# Altium PCB Nano Screw Terminal Adapter.PcbDoc
Units mm, origin at the board's own origin, x right, y up, seen from the top; angles counter-clockwise.
Board outline 70 x 50.5 mm, 2 copper layers (TOP, BOTTOM), stack 1.67 mm thick; 4 components, 29 nets, 236 pads, 0 vias.
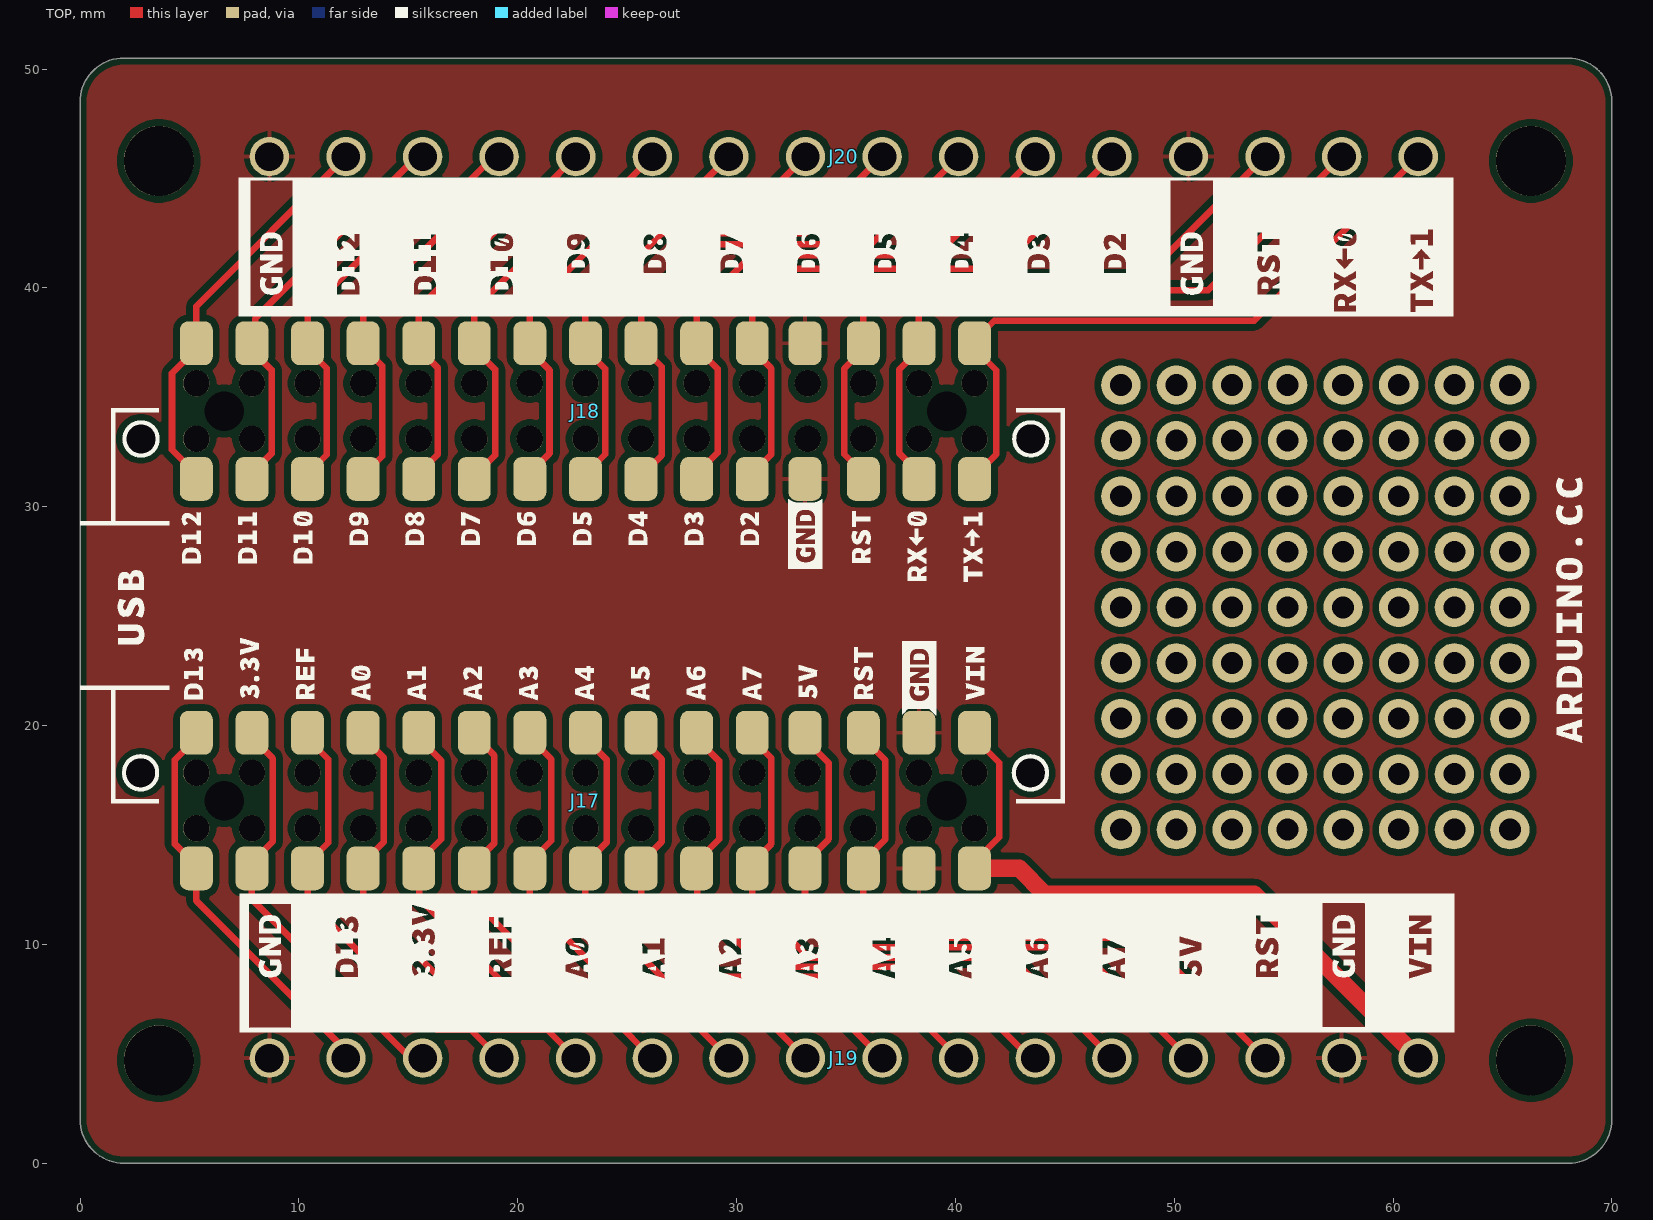
[diagram p0: TOP view]
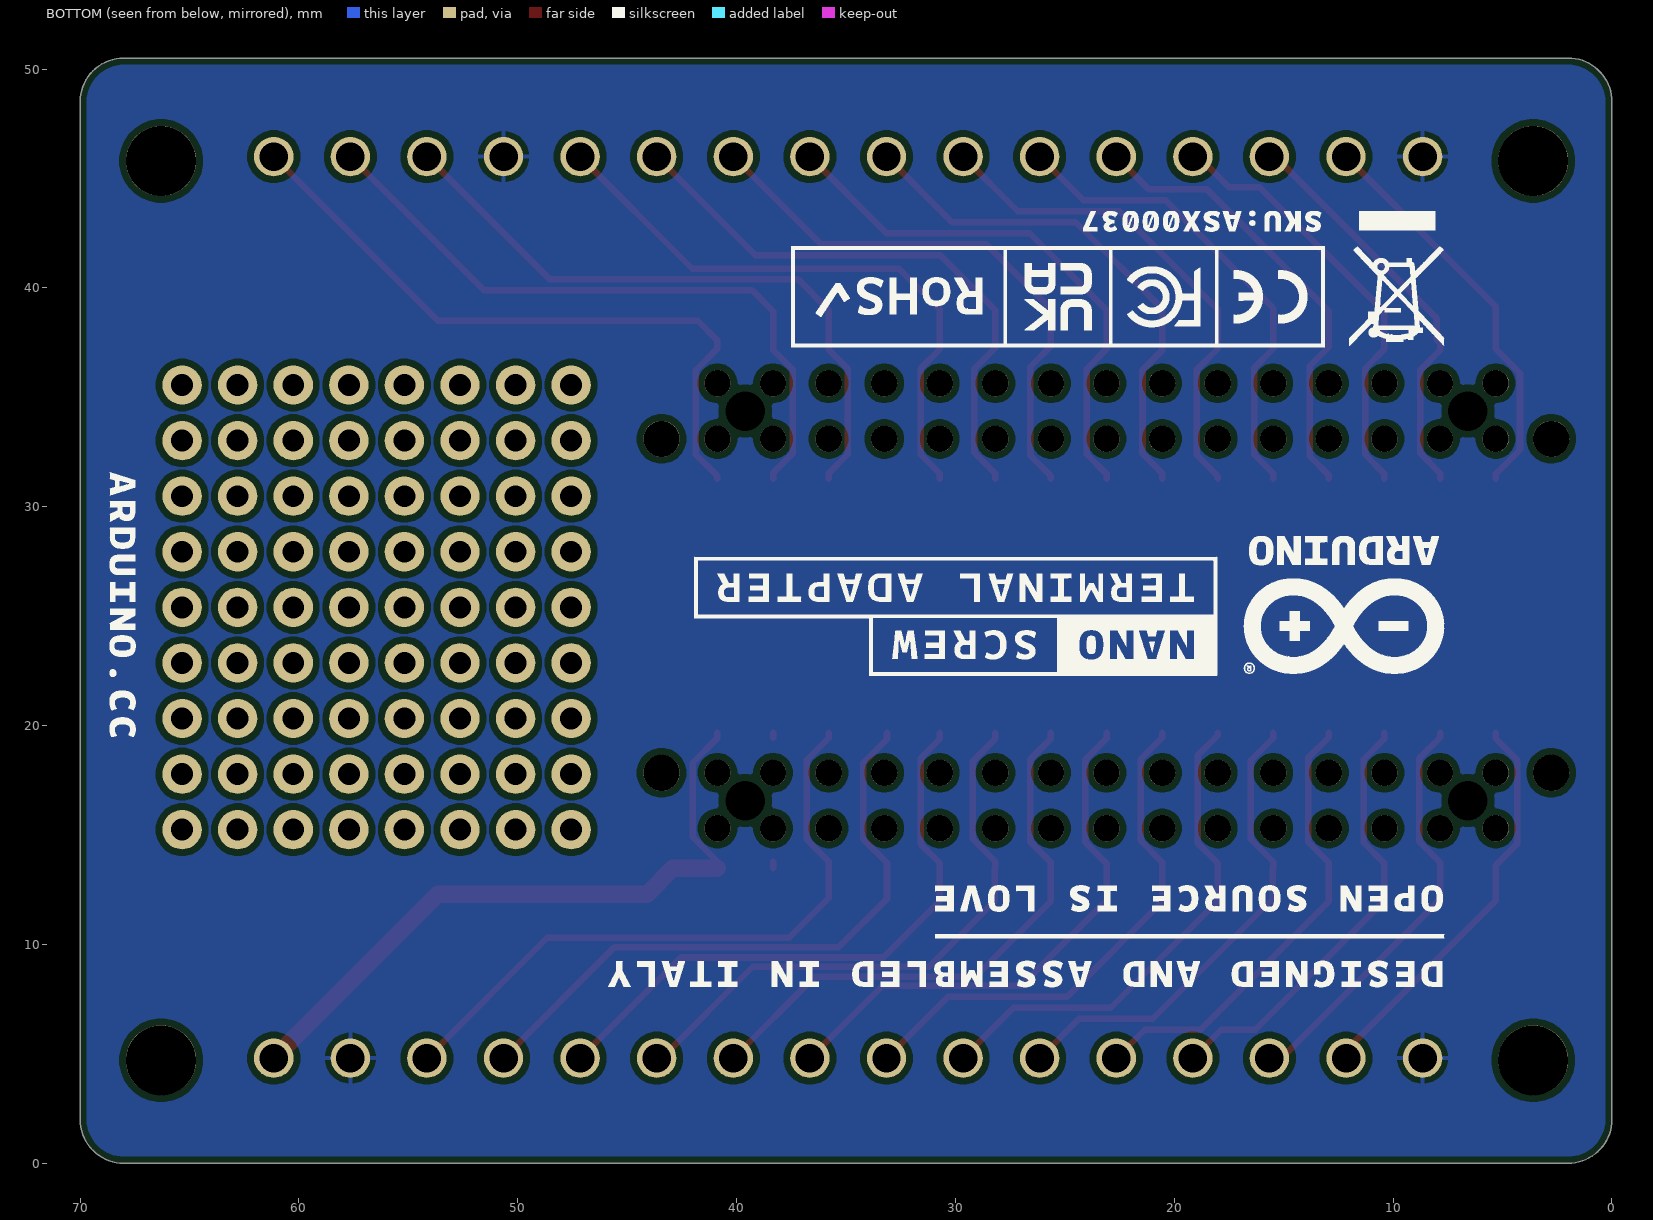
[diagram p1: BOTTOM view, seen from below]

## Layer stack, top to bottom
Top Solder: solder mask 0.0102, Solder Resist, Dk 3.5
TOP: signal copper 0.035
Dielectric2: core 1.6, FR-4, Dk 4.8
BOTTOM: signal copper 0.035
Bottom Solder: solder mask 0.0102, Solder Resist, Dk 3.5

## Board outline
0,2 0,48.5 cw(c2,48.5) 2,50.5 68,50.5 cw(c68,48.5) 70,48.5 70,2 cw(c68,2) 68,0 2,0 cw(c2,2)

## Design rules (kind name [scope] priority, off if disabled: settings)
BoardOutlineClearance Silks [(OnLayer('Top Overlay') OR OnLayer('Bottom Overlay'))] p1: gap=0.1 ignorepadtopadclearanceinfootprint=FALSE
BoardOutlineClearance [All] p2: gap=0.3 ignorepadtopadclearanceinfootprint=FALSE
Clearance COPPER_0.3mm [All] p1: gap=0.127 ignorepadtopadclearanceinfootprint=FALSE except(0.3: Arc-Fill Arc-Poly Arc-Region Track-Fill Track-Poly Track-Region SMDPad-Fill SMDPad-Poly SMDPad-Region THPad-Fill THPad-Poly THPad-Region Via-Fill Via-Poly Via-Region Fill-Fill Fill-Poly Fill-Region Poly-Poly Poly-Region Region-Region)
Clearance "Generic clearance 0.127mm" [All] p2: gap=0.15 ignorepadtopadclearanceinfootprint=FALSE
ComponentClearance [All] p1: gap=0.2 collisioncheckmode=3 verticalgap=0 showdistances=TRUE
DiffPairsRouting USB [InDifferentialPairClass('USB')] p1: maxlimit=0.15 minlimit=0.15 mostfreqgap=0.15 toplayer_minwidth=0.15 toplayer_maxwidth=0.21 toplayer_prefwidth=0.2 bottomlayer_minwidth=0.15 bottomlayer_maxwidth=0.21 bottomlayer_prefwidth=0.2 impedanceprofiledriven=TRUE impedanceprofileid={E6B00C31-4C8E-439C-824F-D2B2CDC26F9C} impedanceprofilevalue=90.000000 maxuncoupledlength=12.7
Height [All] p1: minheight=0 maxheight=30 prefheight=12.7
HoleSize [All] p1: absolutevalues=TRUE maxlimit=20 minlimit=0.3 maxpercent=80.000 minpercent=20.000
HoleToHoleClearance [All] p1: gap=0.14 allowstackedmicrovias=FALSE
MinimumAnnularRing [All] p1: minimumring=0.15
MinimumSolderMaskSliver [All] p1: minsoldermaskwidth=0.15
PlaneConnect [All] p1: pad.planeconnectstyle=Relief pad.reliefexpansion=0.508 pad.reliefentries=4 pad.reliefconductorwidth=0.254 pad.reliefairgap=0.254 via.planeconnectstyle=Direct via.reliefexpansion=0.508 via.reliefentries=4 via.reliefconductorwidth=0.254 via.reliefairgap=0.254
PolygonConnect [All] p1: thpad.connectstyle=Relief thpad.reliefconductorwidth=0.2 thpad.reliefentries=4 thpad.polygonreliefangle="90 Angle" thpad.airgapwidth=0.254 smdpad.connectstyle=Relief smdpad.reliefconductorwidth=0.2 smdpad.reliefentries=4 smdpad.polygonreliefangle="90 Angle" smdpad.airgapwidth=0.254 via.connectstyle=Direct via.reliefconductorwidth=0.254 via.reliefentries=4 via.polygonreliefangle="90 Angle" via.airgapwidth=0.254
RoomDefinition "Nano Screw Terminal Adapter" [InComponentClass('Nano Screw Terminal Adapter')] p1: confinementstyle=ConfineIn formatcopy=TRUE lockcomponents=FALSE outline 76.2,3.4 248.2,3.4 248.2,47.4 76.2,47.4
RoutingVias StandardVias [All] p1: holewidth=0.3 width=0.6 viastyle="Through Hole" minholewidth=0.2 minwidth=0.3 maxholewidth=20 maxwidth=20
SMDToCorner [All] p1: distance=39370
SilkToSilkClearance [All] p1: silktosilkclearance=0.15
SilkToSolderMaskClearance [IsPad] p1: minsilkscreentomaskgap=0.15 clearancetoexposedcopper=TRUE
SolderMaskExpansion VIAtented [IsVia] p1: expansion=0.102 istentingtop=TRUE
SolderMaskExpansion [All] p2: expansion=0.05 istentingtop=FALSE
UnRoutedNet [All] p1: checkbadconnections=TRUE
ViasUnderSMD [All] p1: allowed=FALSE
Width StandardTraces [All] p1: maxlimit=5 minlimit=0.127 preferedwidth=0.3
20 further rules are at their usual default settings.

## Components (designator, comment, footprint, x,y, rotation, side; value= is the part's Value field where it differs from the comment)
J17 "HLE-115-02-F-DV" HLE-115-02-F-DV-Footprint-1 23.094,16.57 r0 top
J18 "HLE-115-02-F-DV" HLE-115-02-F-DV-Footprint-1 23.094,34.37 r0 top
J19 "22TW-277" MK125002GO 34.9,4.8 r0 top
J20 "22TW-277" MK125002GO 34.9,46 r180 top

## Footprints (in the part's own frame and the unit in brackets; to place one, negate y for a bottom-side part, rotate by r counter-clockwise, add the part's x,y. Pads: shape width x height; smd on the part's side, far side on the other; paste and mask are expansions set on the pad)
HLE-115-02-F-DV-Footprint-1 [mm]
  round 1.2 hole 1.2 unplated mask+0.102: 0(-17.78,-1.27) 0(-17.78,1.27) 0(-15.24,-1.27) 0(-15.24,1.27) 0(-12.7,-1.27) 0(-12.7,1.27) 0(-10.16,-1.27) 0(-10.16,1.27) 0(-7.62,-1.27) 0(-7.62,1.27) 0(-5.08,-1.27) 0(-5.08,1.27) 0(-2.54,-1.27) 0(-2.54,1.27) 0(0,-1.27) 0(0,1.27) 0(2.54,-1.27) 0(2.54,1.27) 0(5.08,-1.27) 0(5.08,1.27) 0(7.62,-1.27) 0(7.62,1.27) 0(10.16,-1.27) 0(10.16,1.27) 0(12.7,-1.27) 0(12.7,1.27) 0(15.24,-1.27) 0(15.24,1.27) 0(17.78,-1.27) 0(17.78,1.27)
  round 0 hole 1.8 unplated paste-5: 0(-16.51,0) 0(16.51,0)
  rrect50% 1.5x2 smd mask+0.05: 1(-17.78,-3.1) 1(-17.78,3.1) 2(-15.24,-3.1) 2(-15.24,3.1) 3(-12.7,-3.1) 3(-12.7,3.1) 4(-10.16,-3.1) 4(-10.16,3.1) 5(-7.62,-3.1) 5(-7.62,3.1) 6(-5.08,-3.1) 6(-5.08,3.1) 7(-2.54,-3.1) 7(-2.54,3.1) 8(0,-3.1) 8(0,3.1) 9(2.54,-3.1) 9(2.54,3.1) 10(5.08,-3.1) 10(5.08,3.1) 11(7.62,-3.1) 11(7.62,3.1) 12(10.033,-3.1) 12(10.033,3.1) 13(12.7,-3.1) 13(12.7,3.1) 14(15.24,-3.1) 14(15.24,3.1) 15(17.78,-3.1) 15(17.78,3.1)
  body extent -19.05,-3.29 19.05,3.29, height 3.71
MK125002GO [mm]
  round 1.8 hole 1.3: 1(-26.25,0) 2(-22.75,0) 3(-19.25,0) 4(-15.75,0) 5(-12.25,0) 6(-8.75,0) 7(-5.25,0) 8(-1.75,0) 9(1.75,0) 10(5.25,0) 11(8.75,0) 12(12.25,0) 13(15.75,0) 14(19.25,0) 15(22.75,0) 16(26.25,0)
  body extent -28.48,-3.75 28.47,3.25, height 8.31

## Part data
J17 J18: library part J0233-A.13, "Board Connector, 30 Contact(s), 2 Row(s), Female, Straight, Surface Mount Terminal, Socket GPinto", Manufacturer=Samtec, Code Arduino=J0233, Connector Type="BOARD CONNECTOR", Contact Material=Copper, Mount=Board, Number of Contacts=30, Part Number=HLE-115-02-F-DV, REACH SVHC=Yes, Termination=SMD/SMT
J19 J20: library part J0275-A.6, "CONN MORS.CS 16v p3,5 10A aLING.VER BLACK", Manufacturer="4U CON", Max Current Rating=10A, Code Arduino=J0275, Number of Conductors=16, Number of Contacts=16, Part Number=22TW-277, Pin Count=16

## Free pads (board coordinates)
  round 1.8 hole 1 unplated: 0(47.56,15.24) 0(47.56,17.78) 0(47.56,20.32) 0(47.56,22.86) 0(47.56,25.4) 0(47.56,27.94) 0(47.56,30.48) 0(47.56,33.02) 0(47.56,35.56) 0(50.1,15.24) 0(50.1,17.78) 0(50.1,20.32) 0(50.1,22.86) 0(50.1,25.4) 0(50.1,27.94) 0(50.1,30.48) 0(50.1,33.02) 0(50.1,35.56) 0(52.64,15.24) 0(52.64,17.78) 0(52.64,20.32) 0(52.64,22.86) 0(52.64,25.4) 0(52.64,27.94) 0(52.64,30.48) 0(52.64,33.02) 0(52.64,35.56) 0(55.18,15.24) 0(55.18,17.78) 0(55.18,20.32) 0(55.18,22.86) 0(55.18,25.4) 0(55.18,27.94) 0(55.18,30.48) 0(55.18,33.02) 0(55.18,35.56) 0(57.72,15.24) 0(57.72,17.78) 0(57.72,20.32) 0(57.72,22.86) 0(57.72,25.4) 0(57.72,27.94) 0(57.72,30.48) 0(57.72,33.02) 0(57.72,35.56) 0(60.26,15.24) 0(60.26,17.78) 0(60.26,20.32) 0(60.26,22.86) 0(60.26,25.4) 0(60.26,27.94) 0(60.26,30.48) 0(60.26,33.02) 0(60.26,35.56) 0(62.8,15.24) 0(62.8,17.78) 0(62.8,20.32) 0(62.8,22.86) 0(62.8,25.4) 0(62.8,27.94) 0(62.8,30.48) 0(62.8,33.02) 0(62.8,35.56) 0(65.34,15.24) 0(65.34,17.78) 0(65.34,20.32) 0(65.34,22.86) 0(65.34,25.4) 0(65.34,27.94) 0(65.34,30.48) 0(65.34,33.02) 0(65.34,35.56)
  round 1.651 hole 1.651 unplated: MH(2.774,17.84) MH(2.774,33.1) MH(43.429,17.84) MH(43.429,33.1)
  round 3.2 hole 3.2 unplated: MH(3.6,4.7) MH(3.6,45.8) MH(66.3,4.7) MH(66.3,45.8)

## Nets (pads, with @x,y where several pads share a name; then routed paths per layer and width w, separated by ;. In a path a pad name is that pad's centre, name@x,y a point inside that pad or via, vN(x,y) a via of type N, cw(c..) or ccw(c..) an arc to the next point about the centre after c; other vN are vias at no path point)
+3V3: J17.2 J19.3 | length 19.2
  TOP w0.3: J17.2@7.854,19.67 7.854,19.446 8.811,18.489 8.811,14.711 7.854,13.754 7.854,13.47 7.854,12.046 14.813,5.087 15.363,5.087 J19.3
+5V: J17.12 J19.13 | length 29
  TOP w0.3: J17.12@33.127,19.67 33.127,19.373 34.22,18.28 34.22,14.82 33.127,13.727 33.127,12.073 35.327,9.873 45.577,9.873 J19.13
A0/D14: J17.4 J19.5 | length 21.3
  TOP w0.3: J17.4@12.934,13.47 12.934,13.734 13.885,14.685 13.885,18.515 12.934,19.466 J17.4@12.934,19.67 ; J17.4@12.934,13.598 12.934,11.966 18.8,6.1 21.35,6.1 J19.5
A1/D15: J17.5 J19.6 | length 22.1
  TOP w0.3: J17.5@15.474,19.67 15.474,19.426 16.5,18.4 16.5,14.8 15.474,13.774 15.474,13.47 15.5,13.444 15.5,12.086 20.986,6.6 24.35,6.6 J19.6
A2/D16: J17.6 J19.7 | length 23.1
  TOP w0.3: J17.6@18.014,19.67 18.014,19.542 18.931,18.625 18.931,14.631 18.014,13.714 18.014,11.986 22.9,7.1 27.35,7.1 J19.7
A3/D17: J17.7 J19.8 | length 24.1
  TOP w0.3: J17.7@20.554,19.67 20.554,19.446 21.532,18.468 21.532,14.732 20.554,13.754 20.554,11.946 24.9,7.6 30.35,7.6 J19.8
A4/D18: J17.8 J19.9 | length 25
  TOP w0.3: J17.8@23.094,19.67 23.094,19.406 24.073,18.427 24.073,14.673 23.094,13.694 23.094,12.006 26.998,8.102 33.348,8.102 J19.9
A5/D19: J17.9 J19.10 | length 26
  TOP w0.3: J17.9@25.634,19.67 25.634,19.404 26.573,18.465 26.573,14.684 25.634,13.745 25.634,11.966 29.071,8.529 36.421,8.529 J19.10
A6/D20: J17.10 J19.11 | length 27
  TOP w0.3: J17.10@28.174,19.67 28.174,19.41 29.2,18.384 29.2,18.054 29.2,14.8 28.174,13.774 28.174,13.47 28.2,13.444 28.2,11.976 31.203,8.973 39.262,8.973 43.435,4.8 J19.11
A7/D21: J17.11 J19.12 | length 27.8
  TOP w0.3: J17.11@30.714,19.67 30.714,19.386 31.591,18.509 31.591,14.59 30.714,13.713 30.714,11.986 33.3,9.4 42.55,9.4 J19.12
AREF: J17.3 J19.4 | length 20.2
  TOP w0.3: J17.3@10.394,19.67 10.394,19.406 11.34,18.46 11.34,14.64 10.394,13.694 10.394,12.006 16.3,6.1 17.85,6.1 J19.4
D0/TX: J18.15 J20.1 | length 30.9
  TOP w0.3: J18.15@40.874,31.27 40.874,31.398 41.865,32.389 41.865,36.235 40.874,37.226 40.874,37.598 41.776,38.5 53.65,38.5 J20.1
D1/RX: J18.14 J20.2 | length 30.8
  TOP w0.3: J18.14@38.334,31.27 38.334,31.54 37.425,32.449 37.425,36.26 38.334,37.169 J18.14@38.334,37.47 ; J18.14@38.334,37.342 38.334,38.934 39.3,39.9 51.55,39.9 J20.2@57.65,46
D2: J18.11 J20.5 | length 27.8
  TOP w0.3: J18.11@30.714,31.27 30.714,31.52 31.591,32.397 31.591,36.309 30.714,37.186 30.714,39.014 32.573,40.873 42.023,40.873 J20.5
D3: J18.10 J20.6 | length 26.9
  TOP w0.3: J18.10@28.174,31.27 28.174,31.502 29.134,32.462 29.134,36.299 28.174,37.259 28.174,38.974 30.7,41.5 39.15,41.5 J20.6
D4: J18.9 J20.7 | length 25.9
  TOP w0.3: J18.9@25.634,31.27 25.634,31.398 26.579,32.344 26.579,36.396 25.634,37.342 25.634,39.034 28.6,42 36.15,42 J20.7
D5: J18.8 J20.8 | length 24.9
  TOP w0.3: J18.8@23.094,31.27 23.094,31.494 24.001,32.401 24.001,36.299 23.094,37.206 23.094,38.994 26.6,42.5 33.15,42.5 J20.8
D6: J18.7 J20.9 | length 24.1
  TOP w0.3: J18.7@20.554,31.27 20.554,31.538 21.451,32.435 21.451,36.24 20.554,37.137 J18.7@20.554,37.47 ; J18.7@20.554,37.342 20.554,39.054 24.5,43 30.15,43 J20.9
D7: J18.6 J20.10 | length 23.1
  TOP w0.3: J18.6@18.014,31.27 18.014,31.398 18.966,32.35 18.966,36.268 18.014,37.22 18.014,39.014 22.5,43.5 27.15,43.5 J20.10
D8: J18.5 J20.11 | length 22.1
  TOP w0.3: J18.5@15.474,31.27 15.474,31.52 16.351,32.397 16.351,36.343 15.474,37.22 15.474,39.074 20.4,44 24.15,44 J20.11
D9: J18.4 J20.12 | length 21
  TOP w0.3: J18.4@12.934,31.27 12.934,31.43 13.811,32.307 13.811,36.433 12.934,37.31 12.934,38.934 18.5,44.5 21.15,44.5 J20.12
D10/SS: J18.3 J20.13 | length 20.2
  TOP w0.3: J18.3@10.394,31.27 10.394,31.494 11.271,32.371 11.271,36.329 10.394,37.206 J18.3@10.394,37.47 ; J18.3@10.394,37.342 10.394,38.894 16.1,44.6 17.5,44.6 18.9,46 J20.13
D11/MOSI: J18.2 J20.14 | length 18.8
  TOP w0.3: J18.2@7.854,31.27 7.854,31.529 8.752,32.427 8.752,36.248 7.854,37.146 7.854,37.47 7.998,37.614 7.998,38.598 15.4,46 J20.14
D12/MISO: J18.1 J20.15 | length 18.5
  TOP w0.3: J18.1@5.314,31.27 5.314,31.486 4.2,32.6 4.2,36.1 5.314,37.214 5.314,39.164 J20.15
D13/SCK: J17.1 J19.2 | length 18.5
  TOP w0.3: J17.1@5.314,19.67 5.314,19.414 4.333,18.433 4.333,14.58 5.314,13.598 5.314,11.986 12.15,5.15 J19.2
GND: J17.14 J18.12 J19.1 J19.15 J20.4 J20.16 | length 0.5
  TOP w0.3: J17.14@38.334,13.47 J17.14@38.334,13.766 ; J17.14@38.334,19.434 J17.14@38.334,19.67
RESET: J18.13 J20.3 | length 29.7
  TOP w0.3: J18.13@35.794,31.27 35.794,31.52 34.917,32.397 34.917,36.313 35.794,37.19 35.794,38.994 37.2,40.4 48.55,40.4 J20.3
RESET_R: J17.13 J19.14 | length 29.8
  TOP w0.3: J17.13@35.794,19.67 35.794,19.42 36.8,18.414 36.8,14.8 35.794,13.794 35.794,12.11 37.604,10.3 48.65,10.3 J19.14
VIN: J17.15 J19.16 | length 31
  TOP w0.3: J17.15@40.874,13.5 40.874,13.774 42,14.9 42,18.3 40.874,19.426 J17.15@40.874,19.67
  TOP w0.8: J17.15@40.874,13.47 42.907,13.47 44.077,12.3 53.65,12.3 J19.16
pads on no net: J17.0 J18.0

## Polygon pours and split planes (outlines as drawn)
GND on BOTTOM "NONET_L-01_P-001" (solid, remove dead copper, pour order 0): 69.9,-0.011 69.9,50.706 -0.013,50.706 -0.013,-0.011
GND on TOP "NONET_L-01_P-001" (solid, remove dead copper, pour order 1): 0,0 69.9,0 69.9,50.9 0,50.9
no net on Top Overlay "NONET_L-01_P-001" (solid): 18.728,39.438 18.765,39.4 19.7,39.4 19.7,38.7 18.7,38.7 18.7,39.4
no net on Top Pel "NONET_L-01_P-001" (solid): 45.1,39.5 67.6,39.5 67.6,10.7 45.2,10.7 45.1,10.8

## Silkscreen, mask and mechanical layers (free items; w line width, h text height)
Top Overlay:
  drawing of 145 lines, arcs and shapes, not listed
Bottom Overlay:
  drawing of 118 lines, arcs and shapes, not listed
Top Courtyard:
  lines w2: -1,23.3 -1,2 ccw(c2,2) 2,-1 68,-1 ccw(c68,2) 71,2 71,8.5 ; -1,27.5 -1,49 ; -1,48.5 cw(c2,48.5) 2,51.5 68,51.5 cw(c68,48.5) 71,48.5 71,42.5 ; 71,13 71,38
Top Pel (Mech25):
  the board outline again, w0.1